# Altium PCB Dash.PcbDoc (part 1 of 2)
Units mm, origin at the board's own origin, x right, y up, seen from the top; angles counter-clockwise.
Board outline 82.55 x 101.6 mm, 2 copper layers (Top Layer, Bottom Layer); 87 components, 65 nets, 296 pads, 122 vias.
Unrouted connection lines stored in the file: 3.
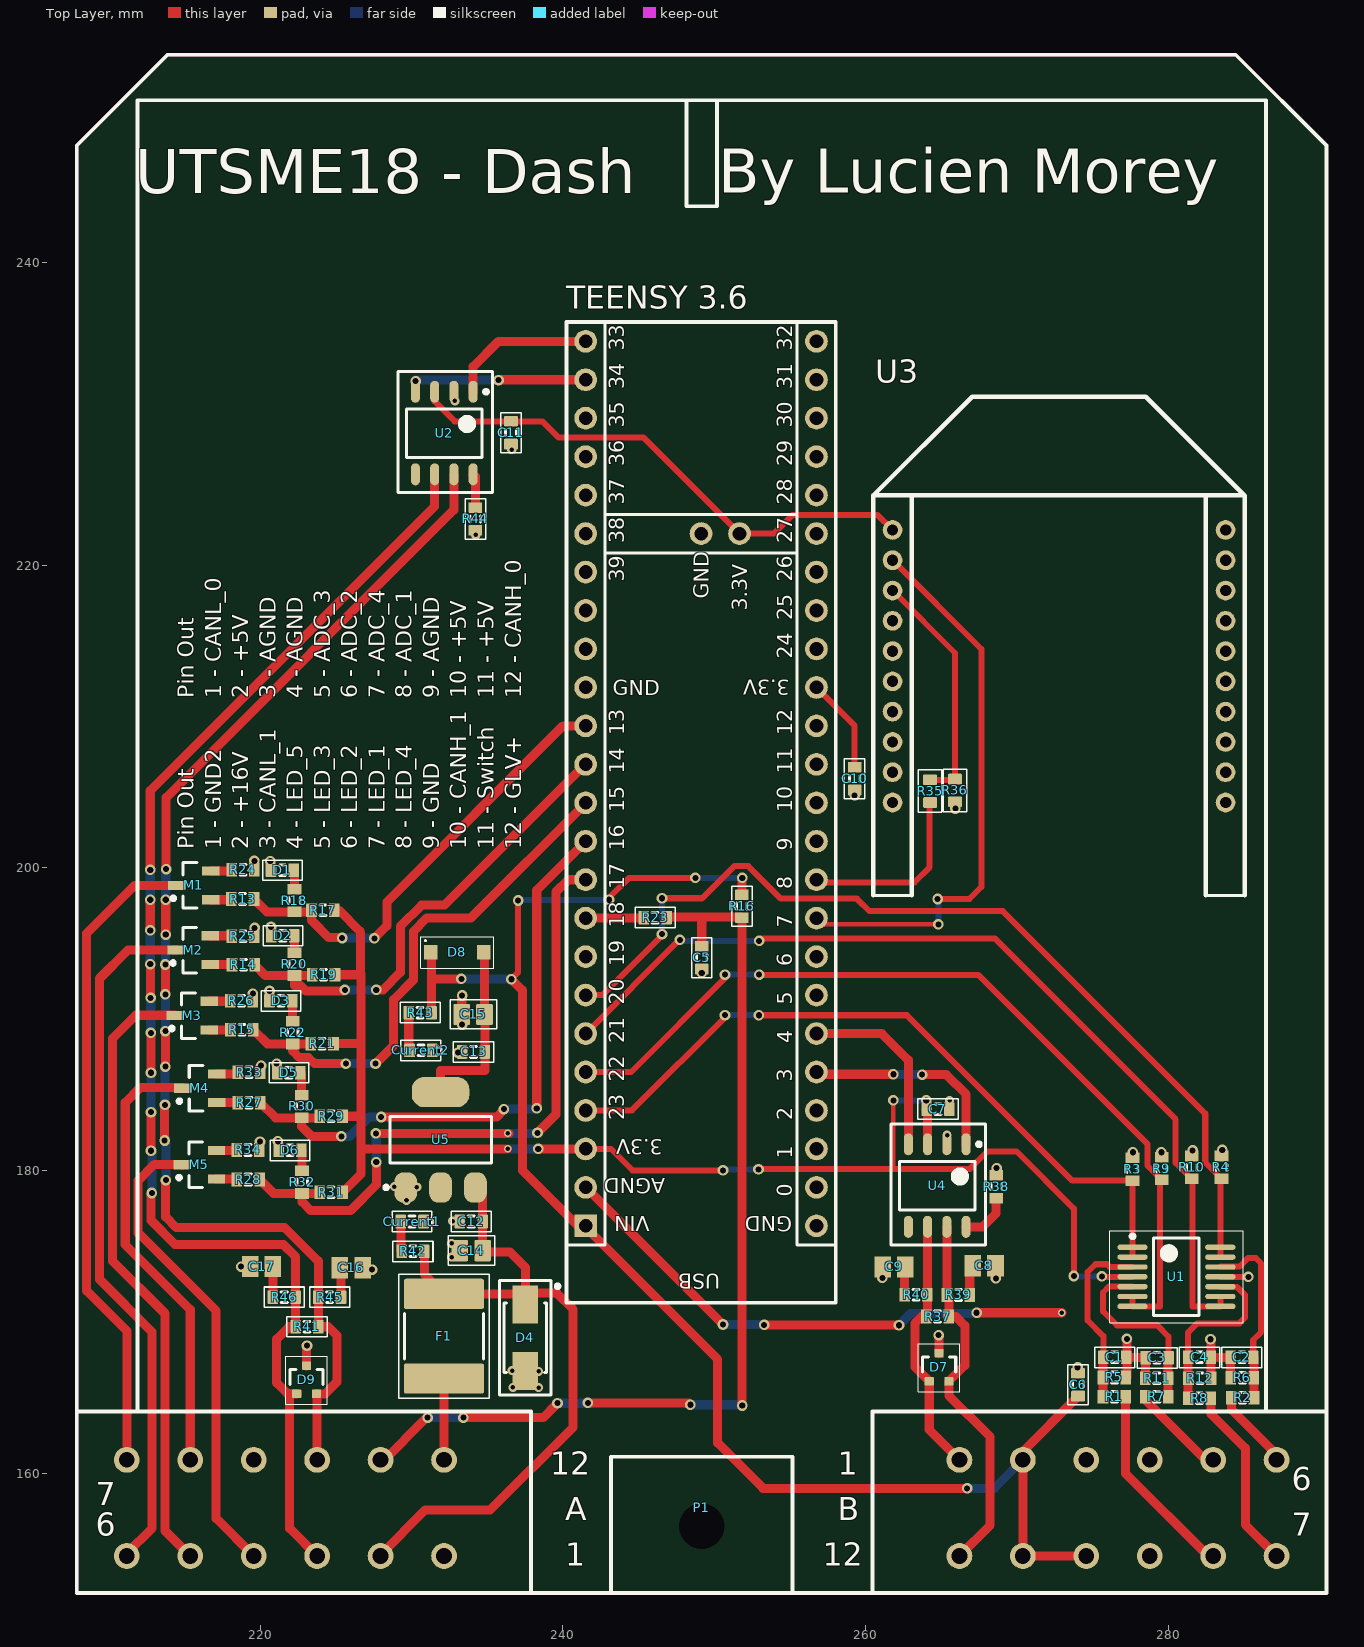
[diagram p0: Top Layer view]
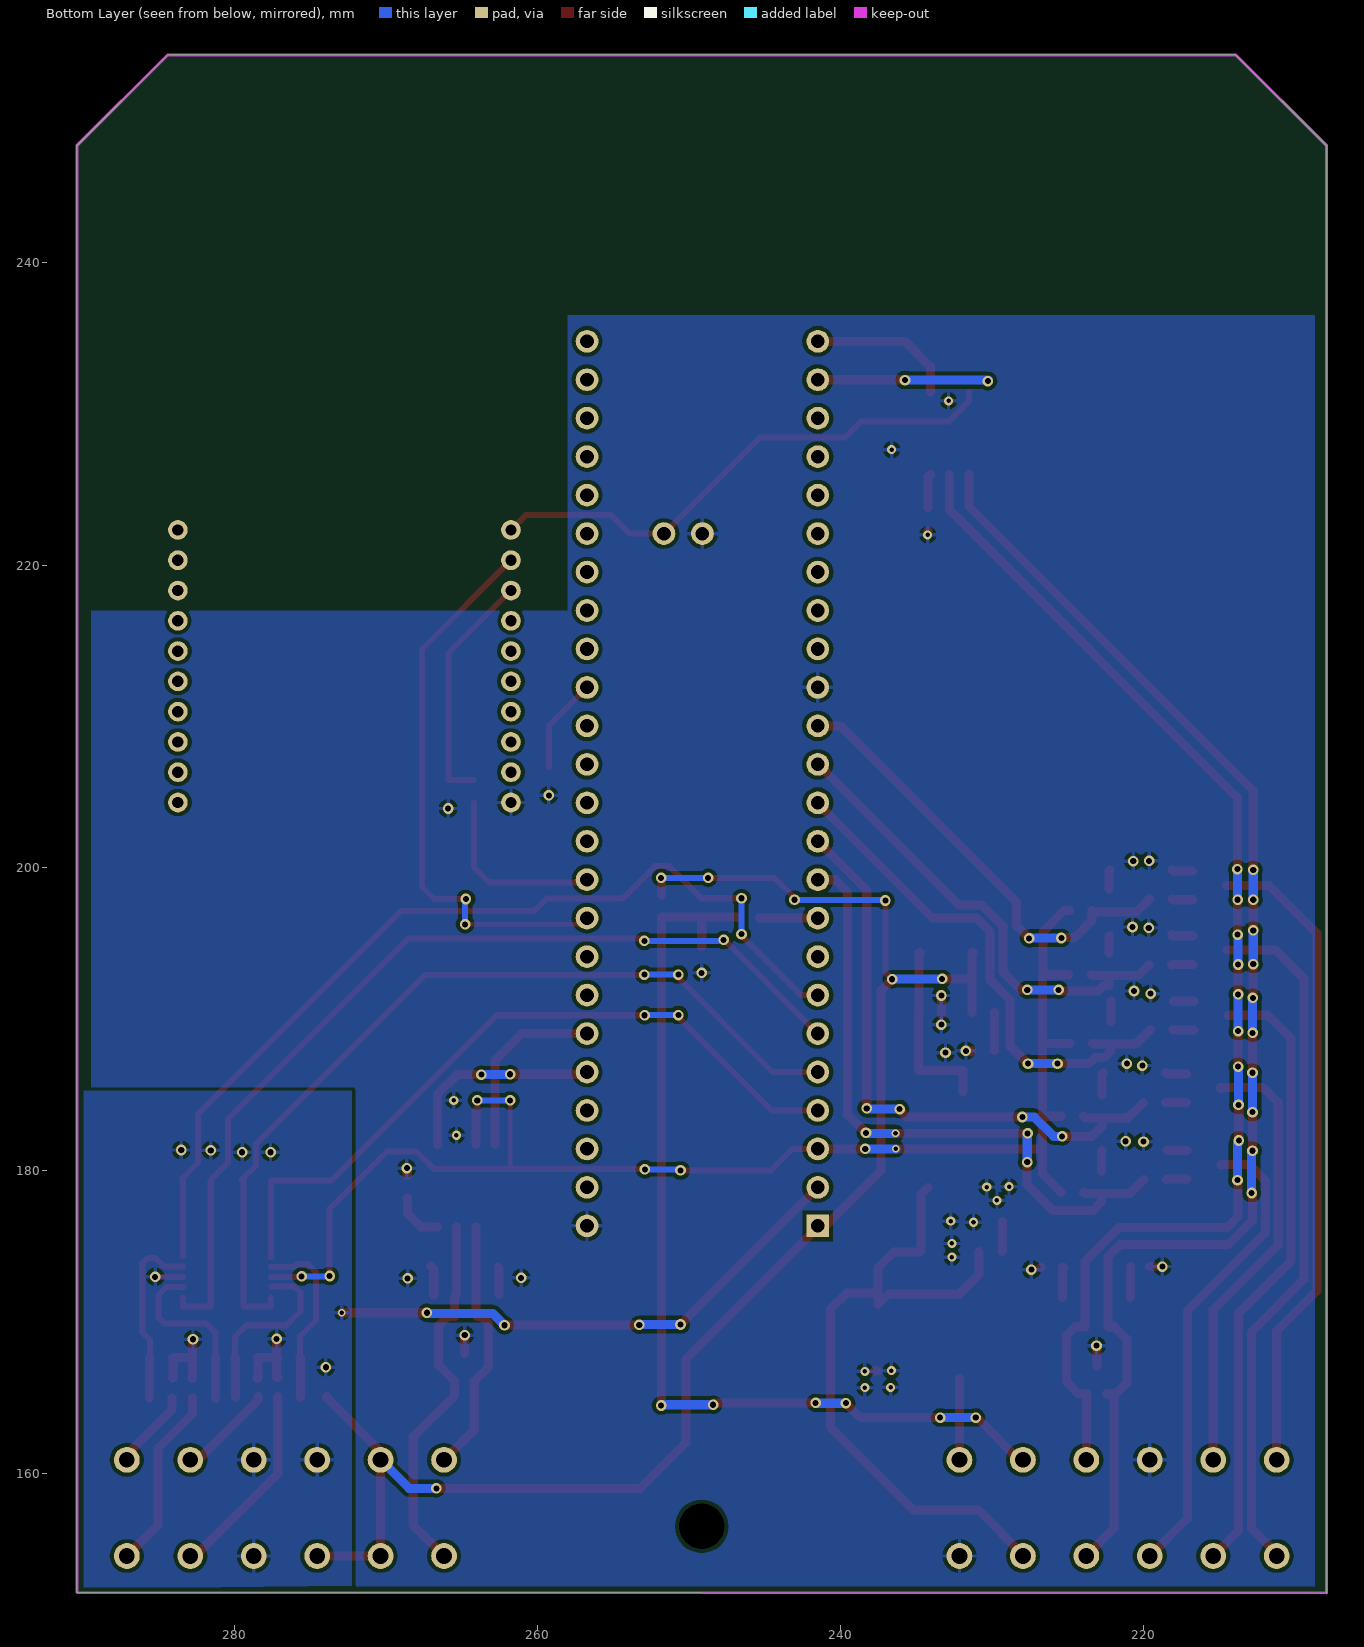
[diagram p1: Bottom Layer view, seen from below]

## Layer stack, top to bottom
Top Solder: solder mask 0.0102, Solder Resist, Dk 3.5
Top Layer: signal copper 0.0356
Dielectric 1: dielectric 0.32, FR-4, Dk 4.8
Bottom Layer: signal copper 0.0356
Bottom Solder: solder mask 0.0102, Solder Resist, Dk 3.5

## Board outline
207.9,152.1 207.9,247.7 213.9,253.7 284.45,253.7 290.45,247.7 290.45,152.15

## Design rules (kind name [scope] priority, off if disabled: settings)
Clearance [All] p1: gap=0.254 ignorepadtopadclearanceinfootprint=FALSE except(0: Arc-Hole Track-Hole SMDPad-Hole THPad-Hole Via-Hole Fill-Hole Poly-Hole Region-Hole Text-Hole; 0.25: Arc-Arc Arc-Track Arc-Text Track-Track Track-Text SMDPad-Text THPad-Text Via-Text Fill-Text Poly-Text Region-Text Text-Text)
ComponentClearance "DTMBoard to rest" [InComponent('P1')] p1: gap=0 collisioncheckmode=3 verticalgap=0 showdistances=FALSE
ComponentClearance [All] p2: gap=0.254 collisioncheckmode=3 verticalgap=0.254 showdistances=FALSE
HoleSize [All] p1: absolutevalues=TRUE maxlimit=5 minlimit=0.3 maxpercent=80.000 minpercent=20.000
PolygonConnect [All] p1: connectstyle=Relief reliefconductorwidth=0.254 reliefentries=4 polygonreliefangle="90 Angle" airgapwidth=0.254
RoutingVias [All] p1: holewidth=0.3 width=0.5 viastyle="Through Hole" minholewidth=0.3 minwidth=0.5 maxholewidth=0.4 maxwidth=0.7
SolderMaskExpansion [All] p1: expansion=0.102
UnConnectedPin [All] p1:
UnRoutedNet [All] p1: checkbadconnections=TRUE
Width [All] p1: maxlimit=0.6 minlimit=0.2 preferedwidth=0.3 minimp=50.000000 maximp=50.000000 favimp=50.000000
27 further rules are at their usual default settings.

## Components (designator, comment, footprint, x,y, rotation, side; value= is the part's Value field where it differs from the comment)
C1 "C 3000pF" J1-0603#1 276.45,167.675 r0 top
C2 "C 3000pF" J1-0603#1 284.85,167.675 r180 top
C3 "C 3000pF" J1-0603#1 279.25,167.65 r180 top
C4 "C 3000pF" J1-0603#1 282.05,167.675 r0 top
C5 "0.1uF Low ESR" J1-0603#1 249.175,194.075 r270 top
C6 "0.1uF Low ESR" J1-0603#1 274.025,165.875 r90 top
C7 "0.1uF Low ESR" J1-0603#1 264.775,184.075 r180 top
C8 "C 560pF" C0805#1 267.825,173.725 r180 top
C9 "C 560pF" C0805#1 261.875,173.65 r0 top
C10 "0.1uF Low ESR" J1-0603#1 259.275,205.9 r270 top
C11 "0.1uF Low ESR" J1-0603#1 236.575,228.75 r90 top
C12 "0.1uF 0603" J1-0603#1 233.95,176.65 r0 top
C13 "0.1uF 0603" J1-0603#1 234.1,187.85 r0 top
C14 "C 10uF 25V 0805" C0805#2 233.95,174.725 r180 top
C15 "C 10uF 25V 0805" C0805#2 234.075,190.325 r180 top
C16 "C 560pF" C0805#1 226.025,173.6 r180 top
C17 "C 560pF" C0805#1 220.1,173.675 r0 top
Current1 "LED 0603" "J1-0603 LED" 230.05,176.65 r0 top
Current2 "LED 0603" "J1-0603 LED" 230.625,187.95 r0 top
D1 "LED 0603" "J1-0603 LED" 221.475,199.85 r180 top
D2 "LED 0603" "J1-0603 LED" 221.5,195.525 r180 top
D3 "LED 0603" "J1-0603 LED" 221.375,191.225 r180 top
D4 "SMAJ16A" DO-214AC 237.525,168.975 r270 top
D5 "LED 0603" "J1-0603 LED" 221.9,186.475 r180 top
D6 "LED 0603" "J1-0603 LED" 221.975,181.35 r180 top
D7 "PESD1CAN" SOT323(SC-70) 264.85,167.025 r90 top
D8 "1N5819" SOD123 233.025,194.425 r0 top
D9 "PESD1CAN" SOT323(SC-70) 223.075,166.2 r90 top
F1 "PTC RESET FUSE 24V 3A 2920" "2920 (7351 Metric)" 232.15,169.075 r270 top
M1 "Mosfet N-Channel 3.3V Switch" SOT23_N 215.625,198.85 r180 top
M2 "Mosfet N-Channel 3.3V Switch" SOT23_N 215.6,194.575 r180 top
M3 "Mosfet N-Channel 3.3V Switch" SOT23_N 215.525,190.25 r180 top
M4 "Mosfet N-Channel 3.3V Switch" SOT23_N 216.025,185.45 r180 top
M5 "Mosfet N-Channel 3.3V Switch" SOT23_N 216,180.4 r180 top
P1 "DTM13-12PA-12PB-R008" DTM13-12PA-12PB-R008 249.172,156.519 r0 top locked
R1 "60.4K R" J1-0603#2 276.425,165.075 r180 top
R2 "60.4K R" J1-0603#2 284.9,165 r0 top
R3 "100K R" J1-0603#2 277.625,180.1 r270 top
R4 "100K R" J1-0603#2 283.5,180.225 r270 top
R5 "100K R" J1-0603#2 276.425,166.35 r0 top
R6 "100K R" J1-0603#2 284.875,166.325 r180 top
R7 "60.4K R" J1-0603#2 279.225,165.075 r0 top
R8 "60.4K R" J1-0603#2 282.05,164.975 r180 top
R9 "100K R" J1-0603#2 279.55,180.15 r270 top
R10 "100K R" J1-0603#2 281.525,180.225 r270 top
R11 "100K R" J1-0603#2 279.225,166.3 r180 top
R12 "100K R" J1-0603#2 282.075,166.3 r0 top
R13 "1K R" J1-0603#2 218.85,197.95 r180 top
R14 "1K R" J1-0603#2 218.9,193.6 r180 top
R15 "1K R" J1-0603#2 218.8,189.325 r180 top
R16 "100K R" J1-0603#1 251.825,197.475 r270 top
R17 "100K R" J1-0603#2 224.15,197.2 r0 top
R18 "1K R" J1-0603#2 222.275,197.85 r270 top
R19 "100K R" J1-0603#2 224.2,192.95 r0 top
R20 "1K R" J1-0603#2 222.275,193.65 r270 top
R21 "100K R" J1-0603#2 224.1,188.4 r0 top
R22 "1K R" J1-0603#2 222.15,189.125 r270 top
R23 "1K R" J1-0603#1 246.1,196.725 r0 top
R24 "220 R" J1-0603#2 218.875,199.875 r0 top
R25 "220 R" J1-0603#2 218.875,195.5 r0 top
R26 "220 R" J1-0603#2 218.775,191.225 r0 top
R27 "1K R" J1-0603#2 219.275,184.5 r180 top
R28 "1K R" J1-0603#2 219.225,179.425 r180 top
R29 "100K R" J1-0603#2 224.7,183.6 r0 top
R30 "1K R" J1-0603#2 222.75,184.25 r270 top
R31 "100K R" J1-0603#2 224.7,178.575 r0 top
R32 "1K R" J1-0603#2 222.775,179.25 r270 top
R33 "220 R" J1-0603#2 219.275,186.5 r0 top
R34 "220 R" J1-0603#2 219.2,181.375 r0 top
R35 "10K R" 0603 264.25,205.075 r270 top value=10K
R36 "15K R" 0603 265.9,205.125 r90 top value=15k
R37 "120 R" J1-0603#2 264.75,170.375 r180 top
R38 "10K R" J1-0603#2 268.625,178.95 r270 top value=10K
R39 "100 R" J1-0603#2 266.125,171.8 r0 top
R40 "100 R" J1-0603#2 263.325,171.825 r0 top
R41 "120 R" J1-0603#1 223.1,169.7 r180 top
R42 "4.7K R" J1-0603#1 230.1,174.675 r180 top
R43 "2.61k R" J1-0603#1 230.575,190.45 r180 top
R44 "10K R" J1-0603#1 234.225,223.05 r90 top value=10K
R45 "100 R" J1-0603#1 224.6,171.65 r0 top
R46 "100 R" J1-0603#1 221.6,171.65 r0 top
"TEENSY 3.6" "Teensy 3.6" "Teensy 3.6" 256.75,181.445 r90 top
U1 "OPA4342EA/250" TSSOP-14 280.525,173 r0 top
U2 "CAN Transceiver 3.3V" 8-SOIC 232.17,228.725 r270 top
U3 "Xbee Pro" "Xbee Pro" 285.016,224.603 r0 top
U4 "CAN Transceiver 3.3V" 8-SOIC 264.725,179.025 r270 top
U5 "5V 1A LDO Regulator NCP1117" SOT-223 231.925,182.05 r90 top

## Footprints (in the part's own frame and the unit in brackets; to place one, negate y for a bottom-side part, rotate by r counter-clockwise, add the part's x,y. Pads: shape width x height; smd on the part's side, far side on the other; paste and mask are expansions set on the pad)
8-SOIC [mm]
  oval 1.45x0.6 smd: 1(-2.725,1.905) 2(-2.725,0.635) 3(-2.725,-0.635) 4(-2.725,-1.905) 5(2.725,-1.905) 6(2.725,-0.635) 7(2.725,0.635) 8(2.725,1.905)
  silkscreen extent -4.06,-3.05 3.94,3.18, body extent -2,-2.5 2,2.5, height 1.75
0603 [mm] "Chip Resistor, Body 1.6x0.8mm, IPC High Density"
  rrect15% 0.7x0.9 smd: 1(-0.75,0) 2(0.75,0)
  silkscreen extent -1.4,-0.76 1.4,0.76, body extent -0.85,-0.48 0.85,0.48, height 0.9
"2920 (7351 Metric)" [mm]
  rrect15% 2x5.3 smd: 1(-2.8,0) 2(2.8,0)
  silkscreen extent -4.1,-3 4.1,3, body extent -3,-2.4 3.2,2.5, height 1.6
C0805#1 [mm] "Chip Capacitor, Body 2.0x1.3mm, IPC High Density"
  rect 1.1x1.4 smd: 1(-0.75,0) 2(0.75,0)
  body extent -1.1,-0.72 1.1,0.72, height 1.4
C0805#2 [mm] "Chip Capacitor, Body 2.0x1.3mm, IPC High Density"
  rrect15% 1.1x1.4 smd: 1(-0.75,0) 2(0.75,0)
  silkscreen extent -1.55,-0.97 1.53,0.95, body extent -1.1,-0.72 1.1,0.72, height 1.4
DO-214AC [mm] "DO-214AC (SMA)"
  rect 2.5x1.7 smd: 1(-2.2,0) 2(2.2,0)
  silkscreen extent -3.77,-1.7 3.77,2.25, body extent -2.3,-1.39 2.3,1.4, height 2.29
DTM13-12PA-12PB-R008 [mm]
  round 1.7 hole 1.04: 1(-17.02,-1.96) 2(-21.21,-1.96) 3(-25.4,-1.96) 4(-29.59,-1.96) 5(-33.78,-1.96) 6(-37.97,-1.96) 7(-37.97,4.39) 8(-33.78,4.39) 9(-29.59,4.39) 10(-25.4,4.39) 11(-21.21,4.39) 12(-17.02,4.39) 13(17.02,4.39) 14(21.21,4.39) 15(25.4,4.39) 16(29.59,4.39) 17(33.78,4.39) 18(37.97,4.39) 19(37.97,-1.96) 20(33.78,-1.96) 21(29.59,-1.96) 22(25.4,-1.96) 23(21.21,-1.96) 24(17.02,-1.96)
  round 1.524 hole 3 unplated: ""(0,0)
  silkscreen extent -41.27,-4.41 41.27,97.19
J1-0603#1 [mm] "Chip Resistor, Body 1.6x0.8mm, IPC High Density"
  rrect15% 0.7x0.9 smd: 1(-0.75,0) 2(0.75,0)
  silkscreen extent -1.33,-0.67 1.33,0.67, body extent -0.85,-0.48 0.85,0.48, height 0.9
J1-0603#2 [mm] "Chip Resistor, Body 1.6x0.8mm, IPC High Density"
  rect 0.7x0.9 smd: 1(-0.75,0) 2(0.75,0)
  silkscreen extent -0.2,-0.35 0.2,0.35, body extent -0.85,-0.48 0.85,0.48, height 0.9
"J1-0603 LED" [mm] "Chip Resistor, Body 1.6x0.8mm, IPC High Density"
  rrect15% 0.7x0.9 smd: 1(-0.75,0) 2(0.75,0)
  silkscreen extent -1.33,-0.67 1.3,0.67, body extent -0.85,-0.48 0.85,0.48, height 0.5
SOD123 [mm] "SOD123"
  rect 0.9x0.95 smd: 1(-1.75,0) 2(1.75,0)
  silkscreen extent -2.4,-1.05 2.4,1.02, body extent -1.85,-0.85 1.85,0.85, height 1.45
SOT23_N [mm] "SOT23, 3-Leads, Body 2.9x1.3mm, Pitch 0.95mm, Lead Span 2.3mm - Reverse Pinning, IPC Medium Density"
  rect 1.15x0.6 smd: 1(1.125,0) 2(-1.125,-0.95) 3(-1.125,0.95)
  silkscreen extent -0.2,-1.5 1.47,1.5, body extent -0.7,-1.5 0.7,1.5, height 1.1
SOT323(SC-70) [mm] "SOT323(SC-70)"
  rrect15% 0.55x0.6 smd: 1(-0.925,0.65) 2(-0.925,-0.65) 3(0.925,0)
  silkscreen extent -1.63,-1.35 1.55,1.38, body extent -1.15,-1.1 1.15,1.1, height 1.1
SOT-223 [mm] "SOT223, 4-Leads, Body 6.50x7.00mm (avg), Pitch 2.30mm, IPC Medium Density"
  rrect80% 2x1.5 smd: 1(-3.15,2.3) 2(-3.15,0) 3(-3.15,-2.3)
  rrect80% 2x3.8 smd: 2(3.15,0)
  silkscreen extent -3.27,-3.35 1.55,3.72, body extent -3.5,-3.35 3.5,3.35, height 1.8
"Teensy 3.6" [mm]
  round 1.5 hole 0.9: 0(-2.54,0) 1(0,0) 2(2.54,0) 3(5.08,0) 3.3V(0,15.24) 3.3V(30.48,0) 3.3V(40.64,5.08) 4(7.62,0) 5(10.16,0) 6(12.7,0) 7(15.24,0) 8(17.78,0) 9(20.32,0) 10(22.86,0) 11(25.4,0) 12(27.94,0) 13(27.94,15.24) 14(25.4,15.24) 15(22.86,15.24) 16(20.32,15.24) 17(17.78,15.24) 18(15.24,15.24) 19(12.7,15.24) 20(10.16,15.24) 21(7.62,15.24) 22(5.08,15.24) 23(2.54,15.24) 24(33.02,0) 25(35.56,0) 26(38.1,0) 27(40.64,0) 28(43.18,0) 29(45.72,0) 30(48.26,0) 31(50.8,0) 32(53.34,0) 33(53.34,15.24) 34(50.8,15.24) 35(48.26,15.24) 36(45.72,15.24) 37(43.18,15.24) 38(40.64,15.24) 39(38.1,15.24) A21(35.56,15.24) A22(33.02,15.24) AGND(-2.54,15.24) GND(-5.08,0) GND(30.48,15.24) GND(40.64,7.62)
  rect 1.5x1.5 hole 0.9: VIN(-5.08,15.24)
  silkscreen extent -10.16,-1.27 54.61,16.51, body extent -6.74,-1.02 54.61,16.76, height 7.71
TSSOP-14 [mm]
  oval 2x0.35 smd: 1(-2.9,1.95) 2(-2.9,1.3) 3(-2.9,0.65) 4(-2.9,0) 5(-2.9,-0.65) 6(-2.9,-1.3) 7(-2.9,-1.95) 8(2.9,-1.95) 9(2.9,-1.3) 10(2.9,-0.65) 11(2.9,0) 12(2.9,0.65) 13(2.9,1.3) 14(2.9,1.95)
  silkscreen extent -4.4,-3.05 4.4,3.05, body extent -2.25,-2.55 2.25,2.55, height 1.2
"Xbee Pro" [mm]
  round 1.3 hole 0.75: 1(-23.241,-2.278) 2(-23.241,-4.278) 3(-23.241,-6.278) 4(-23.241,-8.278) 5(-23.241,-10.278) 6(-23.241,-12.278) 7(-23.241,-14.278) 8(-23.241,-16.278) 9(-23.241,-18.278) 10(-23.241,-20.278) 11(-1.245,-20.278) 12(-1.245,-18.278) 13(-1.245,-16.278) 14(-1.245,-14.278) 15(-1.245,-12.278) 16(-1.245,-10.278) 17(-1.245,-8.278) 18(-1.245,-6.278) 19(-1.245,-4.278) 20(-1.245,-2.278)
  silkscreen extent -24.51,-26.42 0.03,6.53, body extent -24.51,-26.42 0.03,0, height 4.44

## Part data
C1 C2 C3 C4: library part "C 3000pF 0603 50V", "0603 Ceramic Capacitor", Capacitance=3000pF, Manufacturer="Murata Electronics North America", Manufacturer Part Number=GRM1885C1H302JA01D, Operating Temperature="-55°C ~ 125°C", Package / Case="0603 (1608 Metric)", Ratings=-, Supplier Part Number 1=490-6384-1-ND, Temperature Coefficient="C0G, NP0", Tolerance=±5%, Voltage - Rated=50V, Applications="General Purpose", Category=Capacitors, ComponentLink1Description=http://www.murata.com/~/media/webrenewal/support/library/catalog/products/capacitor/mlcc/c02e.ashx, ComponentLink1URL=http://www.murata.com/~/media/webrenewal/support/library/catalog/products/capacitor/mlcc/c02e.ashx, Features=-, Height - Seated (Max)=-, Lead Spacing=-, Lead Style=-, Mounting Type="Surface Mount, MLCC", Packaging="Cut Tape (CT)", Part Status=Active, Pricing 1="1=0.28, 10=0.201, 100=0.0945, 1000=0.05483 (AUD)", RoHS="RoHS Compliant", Size / Dimension="0.063\" L x 0.031\" W (1.60mm x 0.80mm)", Stock 1=84271, Supplier 1=Digi-Key, Thickness (Max)="0.035\" (0.90mm)"
C5 C6 C7 C10 C11: library part "C0.1uF  Low ESR 0603 250V", "CAP CER 0.1UF 100V 10% X7R 0603", Capacitance=100pF, Manufacturer="AVX Corporation", Manufacturer Part Number=06031U101GAT2A, Operating Temperature="-55°C ~ 125°C", Package / Case="0603 (1608 Metric)", Ratings=-, Supplier Part Number 1=478-10231-1-ND, Temperature Coefficient="C0G, NP0", Tolerance=±2%, Voltage - Rated=100V, Applications="RF, Microwave, High Frequency", Category=Capacitors, ComponentLink1Description=http://datasheets.avx.com/AutoU_Series.pdf, ComponentLink1URL=http://datasheets.avx.com/AutoU_Series.pdf, Features="Ultra-Low ESR", Height - Seated (Max)=-, Lead Spacing=-, Lead Style=-, Mounting Type="Surface Mount, MLCC", Packaging="Cut Tape (CT)", Part Status=Active, Pricing 1="1=0.49, 10=0.337, 100=0.2025, 500=0.15186, 1000=0.12823 (AUD)", RoHS="RoHS Compliant", Size / Dimension="0.060\" L x 0.030\" W (1.52mm x 0.76mm)", Stock 1=16000, Supplier 1=Digi-Key, Thickness (Max)="0.036\" (0.91mm)"
C8 C9 C16 C17: library part "C 560pF 0805 50V", "0805 Ceramic Capacitor", Capacitance=560pF, Manufacturer=KEMET, Manufacturer Part Number=C0805C561K5RACTU, Operating Temperature="-55°C ~ 125°C", Package / Case="0805 (2012 Metric)", Ratings=-, Supplier Part Number 1=399-1143-1-ND, Temperature Coefficient=X7R, Tolerance=±10%, Voltage - Rated=50V, Applications="General Purpose", Category=Capacitors, ComponentLink1Description=http://www.kemet.com/docfinder?Partnumber=C0805C561K5RACTU, ComponentLink1URL=http://www.kemet.com/docfinder?Partnumber=C0805C561K5RACTU, Failure Rate=-, Features="Low ESL", Height - Seated (Max)=-, Lead Spacing=-, Lead Style=-, Mounting Type="Surface Mount, MLCC", Packaging="Cut Tape (CT)", Part Status=Active, Pricing 1="1=0.35, 10=0.247, 25=0.1972, 50=0.1646, 100=0.1398, 250=0.11108, 500=0.09872, 1000=0.08636 (AUD)", RoHS="RoHS Compliant", Size / Dimension="0.079\" L x 0.049\" W (2.00mm x 1.25mm)", Stock 1=51668, Supplier 1=Digi-Key, Thickness (Max)="0.035\" (0.88mm)"
C12 C13: library part "C 0.1uF 0603 50V", "CAP CER 0.1UF 50V X8L 0603", Capacitance=100nF, Case/Package=0603, Case Code (Metric)=1608, Dielectric=X8L, Manufacturer=Murata, Manufacturer Part Number=GCM188L81H104KA57D, Max Operating Temperature=150°C, Min Operating Temperature=-55°C, Package Quantity=4000, Supplier Part Number 1=490-6049-6-ND, Tolerance=10%, Voltage=50V, Case Code (Imperial)=0603, ComponentLink1Description=https://datasheet.ciiva.com/5999/1725424-5999395.pdf, ComponentLink1URL=https://datasheet.ciiva.com/5999/1725424-5999395.pdf, ComponentLink2Description=https://datasheet.ciiva.com/7823/1725424-7823589.pdf, ComponentLink2URL=https://datasheet.ciiva.com/7823/1725424-7823589.pdf, ComponentLink3Description=https://datasheet.ciiva.com/14589/70095383-14589014.pdf, ComponentLink3URL=https://datasheet.ciiva.com/14589/70095383-14589014.pdf, ComponentLink4Description=https://datasheet.ciiva.com/22749/kem-c1002-x7r-smd-22749657.pdf, ComponentLink4URL=https://datasheet.ciiva.com/22749/kem-c1002-x7r-smd-22749657.pdf, ComponentLink5Description=https://datasheet.ciiva.com/5413/kem-c1002-x7r-smd-5413791.pdf, ComponentLink5URL=https://datasheet.ciiva.com/5413/kem-c1002-x7r-smd-5413791.pdf, ComponentLink6Description=http://www.kemet.com/docfinder?Partnumber=C0603C104K4RACTU, ComponentLink6URL=http://www.kemet.com/docfinder?Partnumber=C0603C104K4RACTU, ComponentLink7Description=https://datasheet.ciiva.com/6277/s0717e-6277799.pdf, ComponentLink7URL=https://datasheet.ciiva.com/6277/s0717e-6277799.pdf, ComponentLink8Description=https://datasheet.ciiva.com/6277/s0717e-6277800.pdf, ComponentLink8URL=https://datasheet.ciiva.com/6277/s0717e-6277800.pdf, ComponentLink9Description=https://datasheet.ciiva.com/6277/s0717e-6277801.pdf, ComponentLink9URL=https://datasheet.ciiva.com/6277/s0717e-6277801.pdf, Depth=0.8mm, Height=0.8mm, Lead Free="Lead Free", Length=1.6mm, Mount="Surface Mount", Packaging="Tape and Reel", Pricing 1="1=0.19, 10=0.133, 100=0.0624, 500=0.04378, 1000=0.03624 (USD)", Radiation Hardening=No, Stock 1=175, Supplier 1=Digi-Key, Termination=SMD/SMT, Thickness=0.035inch, Voltage Rating=50V, Voltage Rating (DC)=50V, Width=0.5mm
C14 C15: "CAP CER 10UF 25V X5R 0805", Capacitance=10µF, Manufacturer="Samsung Electro-Mechanics America, Inc.", Manufacturer Part Number=CL21A106KAFN3NE, Operating Temperature="-55°C ~ 85°C", Package / Case="0805 (2012 Metric)", Ratings=-, Supplier Part Number 1=1276-2891-1-ND, Temperature Coefficient=X5R, Tolerance=±10%, Voltage - Rated=25V, Applications="General Purpose", Category=Capacitors, ComponentLink1Description=http://media.digikey.com/pdf/Data%20Sheets/Samsung%20PDFs/CL_Series_MLCC_ds.pdf, ComponentLink1URL=http://media.digikey.com/pdf/Data%20Sheets/Samsung%20PDFs/CL_Series_MLCC_ds.pdf, Features=-, Height - Seated (Max)=-, Lead Spacing=-, Lead Style=-, Mounting Type="Surface Mount, MLCC", Packaging="Cut Tape (CT)", Part Status=Active, Pricing 1="1=0.31, 10=0.209, 100=0.1056, 500=0.07228, 1000=0.06394 (AUD)", RoHS="RoHS Compliant", Size / Dimension="0.079\" L x 0.049\" W (2.00mm x 1.25mm)", Stock 1=116435, Supplier 1=Digi-Key, Thickness (Max)="0.053\" (1.35mm)"
Current1 Current2 D1 D2 D3 D5 D6: "Typical INFRARED GaAs LED", Color=Red, Current - Test=20mA, Lens Color=Colorless, Manufacturer=Dialight, Manufacturer Part Number=5988010107F, Millicandela Rating=60mcd, Package / Case="0603 (1608 Metric)", Supplier Part Number 1=350-2029-1-ND, Voltage - Forward (Vf) (Typ)=2V, Category=Optoelectronics, ComponentLink1Description=http://media.digikey.com/pdf/Data%20Sheets/Dialight%20PDFs/598_Series_0603_Pkg.pdf, ComponentLink1URL=http://media.digikey.com/pdf/Data%20Sheets/Dialight%20PDFs/598_Series_0603_Pkg.pdf, Height (Max)=0.70mm, LatestRevisionDate=08-Jul-2005, LatestRevisionNote="Mech Layer 1 removed.", Lens Style/Size="Rectangle with Flat Top, 1.10mm x 0.80mm", Lens Transparency=Clear, Mounting Type="Surface Mount", PackageDescription="LED; 2 Leads", PackageReference=LED-0, Packaging="Cut Strip", Pricing 1="1=0.6, 10=0.461, 100=0.3308, 250=0.2954, 500=0.25404, 1000=0.19613, 2500=0.17722, 5000=0.1668 (AUD)", Published=8-Jun-2000, Publisher="Altium Limited", RoHS="RoHS Compliant", Size / Dimension="1.60mm L x 0.80mm W", Stock 1=134, Supplier 1=Digi-Key, Viewing Angle=140°, Wavelength - Dominant=635nm, Wavelength - Peak=-
D4: "TVS DIODE 16VWM 26VC SMA", Breakdown Voltage-Max="19.7 V", Breakdown Voltage-Min="17.8 V", Capacitance @ Frequency=-, Clamping Voltage-Max="26 V", Current - Peak Pulse (10/1000µs)=15.4A, Manufacturer=Littelfuse, Operating Temperature="-55°C ~ 150°C (TJ)", Package / Case="DO-214AC, SMA", Power - Peak Pulse=400W, Power Dissipation="400 W", Power Line Protection=No, Supplier Device Package="DO-214AC (SMA)", Supplier Part Number 1=SMAJ16ALFCT-ND, Voltage - Breakdown (Min)=17.8V, Voltage - Clamping (Max) @ Ipp=26V, Voltage - Reverse Standoff (Typ)=16V, Applications="General Purpose", Bidirectional Channels=-, Category="Circuit Protection", ComponentLink1Description=https://datasheet.ciiva.com/340/littelfuse-tvs-diode-smaj-datasheet-pdf-340499.pdf, ComponentLink1URL=https://datasheet.ciiva.com/340/littelfuse-tvs-diode-smaj-datasheet-pdf-340499.pdf, ComponentLink2Description=https://datasheet.ciiva.com/340/littelfuse-tvs-diode-smaj-datasheet-pdf-340500.pdf, ComponentLink2URL=https://datasheet.ciiva.com/340/littelfuse-tvs-diode-smaj-datasheet-pdf-340500.pdf, ComponentLink3Description=https://datasheet.ciiva.com/340/littelfuse-tvs-diode-smaj-datasheet-pdf-340501.pdf, ComponentLink3URL=https://datasheet.ciiva.com/340/littelfuse-tvs-diode-smaj-datasheet-pdf-340501.pdf, ComponentLink4Description=https://datasheet.ciiva.com/16212/littelfuse-tvs-diode-smaj-16212775.pdf, ComponentLink4URL=https://datasheet.ciiva.com/16212/littelfuse-tvs-diode-smaj-16212775.pdf, ComponentLink5Description=https://datasheet.ciiva.com/4508/littelfuse-tvs-diode-smaj-23503-4508106.pdf, ComponentLink5URL=https://datasheet.ciiva.com/4508/littelfuse-tvs-diode-smaj-23503-4508106.pdf, ComponentLink6Description=http://www.littelfuse.com/~/media/electronics/datasheets/tvs_diodes/littelfuse_tvs_diode_smaj_datasheet.pdf.pdf, ComponentLink6URL=http://www.littelfuse.com/~/media/electronics/datasheets/tvs_diodes/littelfuse_tvs_diode_smaj_datasheet.pdf.pdf, Directional=Uni-Directional, Manufacturer Part Number=SMAJ16A, Mounting Type="Surface Mount", Packaging="Cut Tape (CT)", Part Status=Active, Pricing 1="1=0.56, 10=0.433, 25=0.3656, 100=0.2978, 250=0.24672, 500=0.2042, 1000=0.15314, 2500=0.14038 (AUD)", RoHS="RoHS Compliant", Stock 1=34991, Supplier 1=Digi-Key, Type=Zener, Unidirectional Channels=1
D7 D9: Capacitance @ Frequency="9.3pF @ 1MHz", Current - Peak Pulse (10/1000µs)="3A (8/20µs)", Manufacturer="Nexperia USA Inc.", Manufacturer Part Number=PESD1CAN-UX, Operating Temperature="-55°C ~ 150°C (TA)", Package / Case="SC-70, SOT-323", Power - Peak Pulse=150W, Power Line Protection=No, Supplier Device Package=SOT-323-3, Supplier Part Number 1=1727-1306-1-ND, Voltage - Breakdown (Min)=25.4V, Voltage - Clamping (Max) @ Ipp=50V, Voltage - Reverse Standoff (Typ)="24V (Max)", Applications=CAN, Category="Circuit Protection", ComponentLink1Description=http://assets.nexperia.com/documents/data-sheet/PESD1CAN-U.pdf, ComponentLink1URL=http://assets.nexperia.com/documents/data-sheet/PESD1CAN-U.pdf, Mounting Type="Surface Mount", Packaging="Cut Tape (CT)", Part Status=Active, Pricing 1="1=0.49, 10=0.402, 100=0.274, 500=0.20544, 1000=0.15407 (AUD)", RoHS="RoHS Compliant", Stock 1=61695, Supplier 1=Digi-Key, Type=Zener
D8: library part "Diode 1N5819", "Schottky Barrier Rectifier", Capacitance @ Vr, F="60pF @ 4V, 1MHz", Current - Average Rectified (Io)=1A, Current - Reverse Leakage @ Vr="1mA @ 40V", Manufacturer="Diodes Incorporated", Manufacturer Part Number=1N5819HW-7-F, Operating Temperature - Junction="-65°C ~ 125°C", Package / Case=SOD-123, Supplier Part Number 1=1N5819HW-FDICT-ND, Voltage - DC Reverse (Vr) (Max)=40V, Voltage - Forward (Vf) (Max) @ If="450mV @ 1A", Category="Discrete Semiconductor Products", ComponentLink1Description=http://www.diodes.com/assets/Datasheets/ds30217.pdf, ComponentLink1URL=http://www.diodes.com/assets/Datasheets/ds30217.pdf, Diode Type=Schottky, Mounting Type="Surface Mount", Packaging="Cut Tape (CT)", Part Status=Active, Pricing 1="1=0.64, 10=0.471, 100=0.267, 500=0.17682, 1000=0.13556 (AUD)", Reverse Recovery Time (trr)=-, RoHS="RoHS Compliant", Speed="Fast Recovery =< 500ns, > 200mA (Io)", Stock 1=76491, Supplier 1=Digi-Key, Supplier Device Package=SOD-123
F1: Manufacturer="Bourns Inc.", Manufacturer Part Number=MF-LSMF300/24X-2, Operating Temperature="-40°C ~ 85°C", Package / Case="2920 (7351 Metric), Concave", Ratings=AEC-Q200, Supplier Part Number 1=MF-LSMF300/24X-2CT-ND, Voltage - Max=24V, Approvals="cURus, TUV", Category="Circuit Protection", ComponentLink1Description=http://www.bourns.com/docs/Product-Datasheets/mflsmf.pdf, ComponentLink1URL=http://www.bourns.com/docs/Product-Datasheets/mflsmf.pdf, Height - Seated (Max)=-, Lead Spacing=-, Mounting Type="Surface Mount", Packaging="Cut Tape (CT)", Part Status=Active, Pricing 1="1=1.24, 5=1.196, 10=1.12, 50=0.9266, 100=0.7722, 250=0.75288, 500=0.63708, 1000=0.55985 (AUD)", RoHS="RoHS Compliant", Size / Dimension="0.289\" L x 0.202\" W (7.36mm x 5.12mm)", Stock 1=136194, Supplier 1=Digi-Key, Thickness (Max)="0.063\" (1.60mm)", Type=Polymeric
M1 M2 M3 M4 M5: library part "Mosfet IRLML6244TRPBFCT-ND", "MOSFET N-CH 30V 5A SOT23", Current - Continuous Drain (Id) @ 25°C="6.3A (Ta)", Drive Voltage (Max Rds On,  Min Rds On)="2.5V, 4.5V", Manufacturer="Infineon Technologies", Manufacturer Part Number=IRLML6244TRPBF, Operating Temperature="-55°C ~ 150°C (TJ)", Package / Case="TO-236-3, SC-59, SOT-23-3", Power Dissipation (Max)="1.3W (Ta)", Supplier Device Package=Micro3™/SOT-23, Supplier Part Number 1=IRLML6244TRPBFCT-ND, Category="Discrete Semiconductor Products", ComponentLink1Description=https://www.infineon.com/dgdl/irlml6244pbf.pdf?fileId=5546d462533600a4015356686fed261f, ComponentLink1URL=https://www.infineon.com/dgdl/irlml6244pbf.pdf?fileId=5546d462533600a4015356686fed261f, FET Feature=-, FET Type=N-Channel, Mounting Type="Surface Mount", Packaging="Cut Tape (CT)", Part Status=Active, Pricing 1="1=0.74, 10=0.585, 100=0.4017, 500=0.2754, 1000=0.20654 (AUD)", Rds On (Max) @ Id, Vgs="21 mOhm @ 6.3A, 4.5V", RoHS="RoHS Compliant", Stock 1=29388, Supplier 1=Digi-Key, Technology="MOSFET (Metal Oxide)", Vgs (Max)=±12V, Vgs(th) (Max) @ Id="1.1V @ 10µA"
P1: Current Rating=-, Insulation Color=Gray, Manufacturer="TE Connectivity Deutsch Connectors", Supplier Part Number 1=1734-1131-ND, Applications=Automotive, Category="Connectors, Interconnects", ComponentLink1Description=http://www.te.com/commerce/DocumentDelivery/DDEController?Action=srchrtrv&DocNm=DTM13-12PX-12PX-R008&DocType=Customer+Drawing&DocLang=English, ComponentLink1URL=http://www.te.com/commerce/DocumentDelivery/DDEController?Action=srchrtrv&DocNm=DTM13-12PX-12PX-R008&DocType=Customer+Drawing&DocLang=English, Connector Type=Header, Contact Finish - Mating=Nickel, Contact Finish - Post=Tin, Contact Finish Thickness - Mating=-, Contact Finish Thickness - Post=-, Contact Length - Mating=-, Contact Length - Post="0.112\" (2.84mm)", Contact Material=-, Contact Shape=Circular, Contact Type="Male Pin", Fastening Type="Latch Holder", Features="Mounting Flange", Ingress Protection=IP68/IP6K9K, Insulation Height="1.378\" (35.00mm)", Insulation Material=Plastic, Manufacturer Part Number=DTM13-12PA-12PB-R008, Mated Stacking Heights=-, Material Flammability Rating=-, Mounting Type="Panel Mount, Through Hole, Right Angle", Number of Positions="24 (12 + 12)", Number of Positions Loaded=All, Number of Rows=2, Operating Temperature=-, Overall Contact Length=-, Packaging=Bulk, Part Status=Active, Pitch - Mating=-, Pricing 1="1=30.07, 10=27.152, 25=26.0132, 50=24.3874, 100=23.5746, 250=22.27388, 500=21.62356 (AUD)", RoHS="RoHS Compliant", Row Spacing - Mating=-, Shrouding="Shrouded - 4 Wall", Stock 1=3139, Style="Board to Cable/Wire", Supplier 1=Digi-Key, Termination=Solder, Voltage Rating=-
R1 R2 R7 R8: library part R60.4k_0603, "60.4k Resistor 0603", Manufacturer=Yageo, Manufacturer Part Number=RC0603FR-0760K4L, Operating Temperature="-55°C ~ 155°C", Package / Case="0603 (1608 Metric)", Power (Watts)="0.1W, 1/10W", Resistance (Ohms)=60.4k, Supplier Device Package=0603, Supplier Part Number 1=311-60.4KHRCT-ND, Temperature Coefficient=±100ppm/°C, Tolerance=±1%, Category=Resistors, ComponentLink1Description=http://www.yageo.com/documents/recent/PYu-RC_Group_51_RoHS_L_7.pdf, ComponentLink1URL=http://www.yageo.com/documents/recent/PYu-RC_Group_51_RoHS_L_7.pdf, Composition="Thick Film", Failure Rate=-, Features="Moisture Resistant", Height - Seated (Max)="0.022\" (0.55mm)", Packaging="Cut Tape (CT)", Part Status=Active, Pricing 1="1=0.15, 10=0.022, 100=0.009, 1000=0.00403, 2500=0.0035 (AUD)", RoHS="RoHS Compliant", Size / Dimension="0.063\" L x 0.031\" W (1.60mm x 0.80mm)", Stock 1=319012, Supplier 1=Digi-Key
R3 R4 R5 R6 R9 R10 R11 R12 R16 R17 R19 R21 R29 R31: library part R100k_0603, "100k Resistor 0603", Manufacturer=Yageo, Manufacturer Part Number=RC0402FR-07100KL, Operating Temperature="-55°C ~ 155°C", Package / Case="0402 (1005 Metric)", Power (Watts)="0.063W, 1/16W", Resistance (Ohms)=100k, Supplier Device Package=0402, Supplier Part Number 1=311-100KLRCT-ND, Temperature Coefficient=±100ppm/°C, Tolerance=±1%, Category=Resistors, ComponentLink1Description=http://www.yageo.com/documents/recent/PYu-RC_Group_51_RoHS_L_7.pdf, ComponentLink1URL=http://www.yageo.com/documents/recent/PYu-RC_Group_51_RoHS_L_7.pdf, Composition="Thick Film", Failure Rate=-, Features="Moisture Resistant", Height - Seated (Max)="0.016\" (0.40mm)", Packaging="Cut Tape (CT)", Part Status=Active, Pricing 1="1=0.15, 10=0.019, 100=0.008, 1000=0.00358, 2500=0.00311, 5000=0.00257 (AUD)", RoHS="RoHS Compliant", Size / Dimension="0.039\" L x 0.020\" W (1.00mm x 0.50mm)", Stock 1=7264033, Supplier 1=Digi-Key
R13 R14 R15 R18 R20 R22 R23 R27 R28 R30 R32: library part R1k_0603, "1k Resistor 0603", Manufacturer=Yageo, Manufacturer Part Number=RC0603FR-071KL, Operating Temperature="-55°C ~ 155°C", Package / Case="0603 (1608 Metric)", Power (Watts)="0.1W, 1/10W", Resistance (Ohms)=1k, Supplier Device Package=0603, Supplier Part Number 1=311-1.00KHRCT-ND, Temperature Coefficient=±100ppm/°C, Tolerance=±1%, Category=Resistors, ComponentLink1Description=http://www.yageo.com/documents/recent/PYu-RC_Group_51_RoHS_L_7.pdf, ComponentLink1URL=http://www.yageo.com/documents/recent/PYu-RC_Group_51_RoHS_L_7.pdf, Composition="Thick Film", Failure Rate=-, Features="Moisture Resistant", Height - Seated (Max)="0.022\" (0.55mm)", Packaging="Cut Tape (CT)", Part Status=Active, Pricing 1="1=0.15, 10=0.022, 100=0.009, 1000=0.00403, 2500=0.0035 (AUD)", RoHS="RoHS Compliant", Size / Dimension="0.063\" L x 0.031\" W (1.60mm x 0.80mm)", Stock 1=11536947, Supplier 1=Digi-Key
R24 R25 R26 R33 R34: library part R220_0603, "220 Resistor 0603", Manufacturer="TE Connectivity Passive Product", Operating Temperature="-55°C ~ 155°C", Package / Case="0603 (1608 Metric)", Power (Watts)="0.1W, 1/10W", Resistance (Ohms)=220, Supplier Device Package=0603, Supplier Part Number 1=A130087TR-ND, Temperature Coefficient=±100ppm/°C, Tolerance=±1%, Category=Resistors, ComponentLink1Description=https://www.digikey.com.au/product-detail/en/te-connectivity-passive-product/CRGCQ0603J220R/A130087CT-ND/8577919, ComponentLink1URL=https://www.digikey.com.au/product-detail/en/te-connectivity-passive-product/CRGCQ0603J220R/A130087CT-ND/8577919, Composition="Thick Film", Failure Rate=-, Features="Moisture Resistant", Height - Seated (Max)="0.022\" (0.55mm)", Packaging="Cut Tape (CT)", Part Status=Active, RoHS="RoHS Compliant", Size / Dimension="0.063\" L x 0.031\" W (1.60mm x 0.80mm)", Supplier 1=Digi-Key
R35 R38 R44: library part R10k_0603, "10k Resistor 0603", Manufacturer="Panasonic Electronic Components", Manufacturer Part Number=ERJ-3EKF1002V, Operating Temperature="-55°C ~ 155°C", Package / Case="0603 (1608 Metric)", Power (Watts)="0.1W, 1/10W", Resistance (Ohms)=10k, Supplier Device Package=0603, Supplier Part Number 1=P10.0KHCT-ND, Temperature Coefficient=±100ppm/°C, Tolerance=±1%, Category=Resistors, ComponentLink1Description=http://industrial.panasonic.com/www-cgi/jvcr13pz.cgi?E+PZ+3+AOA0002+ERJ3EKF1002V+7+WW, ComponentLink1URL=http://industrial.panasonic.com/www-cgi/jvcr13pz.cgi?E+PZ+3+AOA0002+ERJ3EKF1002V+7+WW, Composition="Thick Film", Features="Automotive AEC-Q200", Height="0.022\" (0.55mm)", LatestRevisionDate=17-Jul-2002, LatestRevisionNote="Re-released for DXP Platform.", Number of Terminations=2, PackageDescription="Axial Device, Thru-Hole; 2 Leads; 0.3 in Pin Spacing", PackageReference=AXIAL-0.3, Packaging="Cut Tape (CT)", Pricing 1="1=0.15, 50=0.0166, 100=0.0122, 250=0.00936, 500=0.00748, 1000=0.00552 (AUD)", Published=8-Jun-2000, Publisher="Altium Limited", RoHS="RoHS Compliant", Size / Dimension="0.063\" L x 0.031\" W (1.60mm x 0.80mm)", Stock 1=10895920, Supplier 1=Digi-Key
R36: library part R15k_0603, "15k Resistor 0603", Manufacturer=Yageo, Manufacturer Part Number=RC0603FR-0715KL, Operating Temperature="-55°C ~ 155°C", Package / Case="0603 (1608 Metric)", Power (Watts)="0.1W, 1/10W", Supplier Device Package=0603, Supplier Part Number 1=311-15.0KHRCT-ND, Temperature Coefficient=±100ppm/°C, Tolerance=±1%, Category=Resistors, ComponentLink1Description=http://www.yageo.com/documents/recent/PYu-RC_Group_51_RoHS_L_7.pdf, ComponentLink1URL=http://www.yageo.com/documents/recent/PYu-RC_Group_51_RoHS_L_7.pdf, Composition="Thick Film", Failure Rate=-, Features="Moisture Resistant", Height - Seated (Max)="0.022\" (0.55mm)", Packaging="Cut Tape (CT)", Part Status=Active, Pricing 1="1=0.14, 10=0.021, 100=0.0084, 1000=0.00376, 2500=0.00326 (AUD)", RoHS="RoHS Compliant", Size / Dimension="0.063\" L x 0.032\" W (1.60mm x 0.80mm)", Stock 1=2420880, Supplier 1=Digi-Key
R37 R41: library part R120_0603, "120 Resistor 0603", Manufacturer=Yageo, Manufacturer Part Number=RC0603FR-07120RL, Operating Temperature="-55°C ~ 155°C", Package / Case="0603 (1608 Metric)", Power (Watts)="0.1W, 1/10W", Resistance (Ohms)=120, Supplier Device Package=0603, Supplier Part Number 1=311-120HRCT-ND, Temperature Coefficient=±100ppm/°C, Tolerance=±1%, Category=Resistors, ComponentLink1Description=http://www.yageo.com/documents/recent/PYu-RC_Group_51_RoHS_L_7.pdf, ComponentLink1URL=http://www.yageo.com/documents/recent/PYu-RC_Group_51_RoHS_L_7.pdf, Composition="Thick Film", Failure Rate=-, Features="Moisture Resistant", Height - Seated (Max)="0.022\" (0.55mm)", Packaging="Cut Tape (CT)", Part Status=Active, Pricing 1="1=0.15, 10=0.022, 100=0.009, 1000=0.00403, 2500=0.0035 (AUD)", RoHS="RoHS Compliant", Size / Dimension="0.063\" L x 0.031\" W (1.60mm x 0.80mm)", Stock 1=2195111, Supplier 1=Digi-Key
R39 R40 R45 R46: library part R100_0603, "100 Resistor 0603", Manufacturer="Panasonic Electronic Components", Manufacturer Part Number=ERJ-3EKF1000V, Operating Temperature="-55°C ~ 155°C", Package / Case="0603 (1608 Metric)", Power (Watts)="0.1W, 1/10W", Resistance (Ohms)=100, Supplier Device Package=0603, Supplier Part Number 1=P100HCT-ND, Temperature Coefficient=±100ppm/°C, Tolerance=±1%, Category=Resistors, ComponentLink1Description=https://industrial.panasonic.com/cdbs/www-data/pdf/RDA0000/AOA0000C283.pdf, ComponentLink1URL=https://industrial.panasonic.com/cdbs/www-data/pdf/RDA0000/AOA0000C283.pdf, Composition="Thick Film", Failure Rate=-, Features="Automotive AEC-Q200", Height - Seated (Max)="0.022\" (0.55mm)", Packaging="Cut Tape (CT)", Part Status=Active, Pricing 1="1=0.14, 10=0.026, 25=0.0184, 50=0.0142, 100=0.0105, 250=0.00796, 500=0.00638, 1000=0.0047 (AUD)", RoHS="RoHS Compliant", Size / Dimension="0.063\" L x 0.031\" W (1.60mm x 0.80mm)", Stock 1=1638281, Supplier 1=Digi-Key
R42: library part R4.7k_0603, "4.7k Resistor 0603", Manufacturer=Yageo, Manufacturer Part Number=RC0603FR-074K7L, Operating Temperature="-55°C ~ 155°C", Package / Case="0603 (1608 Metric)", Power (Watts)="0.1W, 1/10W", Resistance (Ohms)=4.7k, Supplier Device Package=0603, Supplier Part Number 1=311-4.70KHRCT-ND, Temperature Coefficient=±100ppm/°C, Tolerance=±1%, Category=Resistors, ComponentLink1Description=http://www.yageo.com/documents/recent/PYu-RC_Group_51_RoHS_L_7.pdf, ComponentLink1URL=http://www.yageo.com/documents/recent/PYu-RC_Group_51_RoHS_L_7.pdf, Composition="Thick Film", Failure Rate=-, Features="Moisture Resistant", Height - Seated (Max)="0.022\" (0.55mm)", Packaging="Cut Tape (CT)", Part Status=Active, Pricing 1="1=0.15, 10=0.022, 100=0.009, 1000=0.00403, 2500=0.0035 (AUD)", RoHS="RoHS Compliant", Size / Dimension="0.063\" L x 0.031\" W (1.60mm x 0.80mm)", Stock 1=5834802, Supplier 1=Digi-Key
R43: library part R2.61k_0603, "2.61k Resistor 0603", Manufacturer=Yageo, Manufacturer Part Number=RC0603FR-072K61L, Operating Temperature="-55°C ~ 155°C", Package / Case="0603 (1608 Metric)", Power (Watts)="0.1W, 1/10W", Resistance (Ohms)=2.61k, Supplier Device Package=0603, Supplier Part Number 1=311-2.61KHRCT-ND, Temperature Coefficient=±100ppm/°C, Tolerance=±1%, Category=Resistors, ComponentLink1Description=http://www.yageo.com/documents/recent/PYu-RC_Group_51_RoHS_L_7.pdf, ComponentLink1URL=http://www.yageo.com/documents/recent/PYu-RC_Group_51_RoHS_L_7.pdf, Composition="Thick Film", Failure Rate=-, Features="Moisture Resistant", Height - Seated (Max)="0.022\" (0.55mm)", Packaging="Cut Tape (CT)", Part Status=Active, Pricing 1="1=0.15, 10=0.022, 100=0.009, 1000=0.00403, 2500=0.0035 (AUD)", RoHS="RoHS Compliant", Size / Dimension="0.063\" L x 0.031\" W (1.60mm x 0.80mm)", Stock 1=104258, Supplier 1=Digi-Key
"TEENSY 3.6": Current Rating=2A, Insulation Color=Black, Manufacturer=3M, Manufacturer Part Number=929974-01-36-RK, Material Flammability Rating="UL94 V-0", Operating Temperature="-40°C ~ 105°C", Supplier Part Number 1=929974E-01-36-ND, Voltage Rating=1500V, Applications=-, Category="Connectors, Interconnects", ComponentLink1Description=http://multimedia.3m.com/mws/media/22500O/3mtm-boardmount-skt-100-100x-100strt-sldr-tails-ts0815.pdf?&fn=ts0815.pdf, ComponentLink1URL=http://multimedia.3m.com/mws/media/22500O/3mtm-boardmount-skt-100-100x-100strt-sldr-tails-ts0815.pdf?&fn=ts0815.pdf, Connector Type=Receptacle, Contact Finish - Mating=Tin, Contact Finish - Post=Tin, Contact Finish Thickness - Mating="100µin (2.54µm)", Contact Finish Thickness - Post="100µin (2.54µm)", Contact Length - Post="0.125\" (3.18mm)", Contact Material="Copper Alloy", Contact Shape=Square, Contact Type=Forked, Fastening Type=Push-Pull, Features=-, Ingress Protection=-, Insulation Height="0.325\" (8.25mm)", Insulation Material="Polycyclohexylenedimethylene Terephthalate (PCT), Glass Filled", Mated Stacking Heights=-, Mounting Type="Through Hole", Number of Positions=36, Number of Positions Loaded=All, Number of Rows=1, Packaging=Bulk, Part Status=Active, Pitch - Mating="0.100\" (2.54mm)", Pricing 1="1=3.64, 10=3.302, 100=2.8305, 500=2.35872, 1000=2.02176, 5000=1.79263 (AUD)", RoHS="RoHS Compliant", Row Spacing - Mating=-, Stock 1=7206, Style="Board to Board", Supplier 1=Digi-Key, Termination=Solder
U1: Case/Package=TSSOP, Input Bias Current=10pA, Input Offset Voltage (Vos)=6mV, Manufacturer="Texas Instruments", Max Operating Temperature=85°C, Max Supply Voltage=5.5V, Min Operating Temperature=-40°C, Min Supply Voltage=2.7V, Nominal Supply Current=1mA, Package Quantity=250, Power Supply Rejection Ratio (PSRR)=90.46dB, Supplier Part Number 1=OPA4342EADKR-ND, Voltage Gain=124dB, Bandwidth=1MHz, Common Mode Rejection Ratio=76dB, ComponentLink1Description=https://datasheet.ciiva.com/26226/sbos106a-26226441.pdf, ComponentLink1URL=https://datasheet.ciiva.com/26226/sbos106a-26226441.pdf, ComponentLink2Description=https://datasheet.ciiva.com/1798/opa4342-1798587.pdf, ComponentLink2URL=https://datasheet.ciiva.com/1798/opa4342-1798587.pdf, ComponentLink3Description=https://datasheet.ciiva.com/7684/53610-7684523.pdf, ComponentLink3URL=https://datasheet.ciiva.com/7684/53610-7684523.pdf, ComponentLink4Description=https://datasheet.ciiva.com/14458/sbos106a-14458539.pdf, ComponentLink4URL=https://datasheet.ciiva.com/14458/sbos106a-14458539.pdf, ComponentLink5Description=https://datasheet.ciiva.com/1798/opa4342-1798588.pdf, ComponentLink5URL=https://datasheet.ciiva.com/1798/opa4342-1798588.pdf, ComponentLink6Description=https://datasheet.ciiva.com/2974/sbos106a-2974060.pdf, ComponentLink6URL=https://datasheet.ciiva.com/2974/sbos106a-2974060.pdf, ComponentLink7Description=https://datasheet.ciiva.com/1798/opa4342-1798589.pdf, ComponentLink7URL=https://datasheet.ciiva.com/1798/opa4342-1798589.pdf, ComponentLink8Description=https://datasheet.ciiva.com/48711/001072822-da-01-en-ic-opamp-gp-r-opa4342ea-250-tssop-14-tid-48711451.pdf, ComponentLink8URL=https://datasheet.ciiva.com/48711/001072822-da-01-en-ic-opamp-gp-r-opa4342ea-250-tssop-14-tid-48711451.pdf, Gain Bandwidth Product=1MHz, Lead Free="Lead Free", Manufacturer Part Number=OPA4342EA/250, Max I/O Voltage=6mV, Nominal Gain Bandwidth Product=1MHz, Number of Amplifiers=4, Number of Channels=4, Number of Circuits=4, Number of Elements=4, Number of Pins=14, Packaging="Tape and Reel", Pricing 1="1=2.83, 10=2.544, 100=2.0447 (USD)", Radiation Hardening=No, REACH SVHC="No SVHC", Slew Rate=1V/µs, Stock 1=233, Supplier 1=Digi-Key, Unity Gain Bandwidth Product=1MHz
U2 U4: Manufacturer="Texas Instruments", Manufacturer Part Number=SN65HVD230DR, Operating Temperature="-40°C ~ 85°C", Package / Case="8-SOIC (0.154\", 3.90mm Width)", Supplier Device Package=8-SOIC, Supplier Part Number 1=296-11654-1-ND, Voltage - Supply="3 V ~ 3.6 V", Category="Integrated Circuits (ICs)", ComponentLink1Description=http://www.ti.com/lit/ds/symlink/sn65hvd230.pdf, ComponentLink1URL=http://www.ti.com/lit/ds/symlink/sn65hvd230.pdf, Data Rate=1Mbps, Duplex=Half, Mounting Type="Surface Mount", Number of Drivers/Receivers=1/1, Packaging="Cut Tape (CT)", Part Status=Active, Pricing 1="1=3.01, 10=2.698, 100=2.1685, 500=1.78162, 1000=1.4762 (AUD)", Protocol=CAN, RoHS="RoHS Compliant", Stock 1=41612, Supplier 1=Digi-Key, Type=Transceiver
U3: Current Rating="3.9A per Contact", Insulation Color=Black, Manufacturer="Samtec Inc.", Manufacturer Part Number=MMS-110-01-L-SV, Material Flammability Rating=-, Operating Temperature="-55°C ~ 125°C", Supplier Part Number 1=SAM1230-10-ND, Applications=-, Category="Connectors, Interconnects", ComponentLink1Description=http://suddendocs.samtec.com/prints/mms01mkt.pdf, ComponentLink1URL=http://suddendocs.samtec.com/prints/mms01mkt.pdf, Connector Type=Receptacle, Contact Finish - Mating=Gold, Contact Finish - Post=Tin, Contact Finish Thickness - Mating="10µin (0.25µm)", Contact Finish Thickness - Post=-, Contact Length - Post="0.115\" (2.92mm)", Contact Material="Phosphor Bronze", Contact Shape=Square, Contact Type="Female Socket", Fastening Type=Push-Pull, Features=-, Ingress Protection=-, Insulation Height="0.175\" (4.45mm)", Insulation Material="Liquid Crystal Polymer (LCP)", Mated Stacking Heights=-, Mounting Type="Through Hole", Number of Positions=10, Number of Positions Loaded=All, Number of Rows=1, Packaging=Tube, Part Status=Active, Pitch - Mating="0.079\" (2.00mm)", Pricing 1="1=6.2, 10=5.369, 100=4.5428, 500=3.61358, 1000=2.94247, 5000=2.68436, 10000=2.58112 (AUD)", RoHS="RoHS Compliant", Row Spacing - Mating=-, Stock 1=605, Style="Board to Board or Cable", Supplier 1=Digi-Key, Termination=Solder, Voltage Rating=-
U5: Current - Limit (Min)=1A, Manufacturer="ON Semiconductor", Manufacturer Part Number=NCP1117ST50T3G, Operating Temperature="0°C ~ 125°C", Package / Case="TO-261-4, TO-261AA", Supplier Device Package=SOT-223, Supplier Part Number 1=NCP1117ST50T3GOSCT-ND, Voltage - Dropout (Typical)="1.07V @ 800mA", Voltage - Input="Up to 20V", Voltage - Output=5V, Category="Integrated Circuits (ICs)", ComponentLink1Description=http://www.onsemi.com/pub_link/Collateral/NCP1117-D.PDF, ComponentLink1URL=http://www.onsemi.com/pub_link/Collateral/NCP1117-D.PDF, Current - Output=1A, Mounting Type="Surface Mount", Packaging="Cut Tape (CT)", Part Status=Active, Pricing 1="1=0.7, 10=0.604, 100=0.4508, 500=0.35418, 1000=0.27368 (AUD)", Regulator Topology="Positive Fixed", RoHS="RoHS Compliant", Stock 1=36810, Supplier 1=Digi-Key

## Via types
v1: diameter 0.7, hole 0.4, Top Layer to Bottom Layer, 103 vias
v2: diameter 0.6, hole 0.3, Top Layer to Bottom Layer, 16 vias
v3: diameter 0.5, hole 0.3, Top Layer to Bottom Layer, 3 vias

## Nets (pads, with @x,y where several pads share a name; then routed paths per layer and width w, separated by ;. In a path a pad name is that pad's centre, name@x,y a point inside that pad or via, vN(x,y) a via of type N, cw(c..) or ccw(c..) an arc to the next point about the centre after c; other vN are vias at no path point)
+3.3V: "TEENSY 3.6.3.3V" C7.2 C10.1 C11.2 R17.2 R19.2 R21.2 R29.2 R31.2 U1.4 U2.3 U3.1 U4.3 | length 133.5
  Top Layer w0.3: 261.825,180.125 v1(261.825,184.65)
  Top Layer w0.4: U2.3 231.535,230.815 232.85,229.5 C11.2 238.65,229.5 239.725,228.425 245.33,228.425 251.67,222.085 253.935,222.085 255.175,223.325 260.775,223.325 U3.1 ; 241.51,181.445 243.18,181.445 244.6,180.025 v1(250.575,180.025) ; v1@252.795,180.125 261.825,180.125 266.875,180.125 268.025,181.275 269.975,181.275 273.75,177.5 v1(273.75,173.05) ; 256.75,211.925 259.275,209.4 C10.1 ; v1@275.525,173 U1.4
  Top Layer w0.6: R21.2 226.675,188.4 ; R17.2 225.228,197.2 226.6,195.828 226.6,195.728 226.625,195.703 226.625,192.95 R19.2 ; R31.2 226.675,179.8 226.675,181.45 ; R29.2 226.65,183.6 226.675,183.625 ; 226.675,193 226.675,188.4 ; v3(236.35,181.45) 226.675,181.45 ; v1@238.55,181.445 241.51,181.445 ; C7.2@263.975,184.025 264.09,183.91 U4.3 ; 226.675,181.45 226.675,183.625 ; 226.675,183.625 226.675,188.4
  Bottom Layer w0.4: v1@250.55,180.1 v1(252.925,180.1) ; v1(261.825,184.65) v1(264,184.65) ; v1@273.875,173.025 v1(275.6,173.025)
  Bottom Layer w0.6: v3(236.35,181.45) v1(238.375,181.45)
+5V: "TEENSY 3.6.VIN" C6.1 D8.1 P1.14 P1.22 P1.23 R16.1 R43.1 | length 106.2
  Top Layer w0.4: v1(236.6,192.65) 237.05,193.1 v1(237.05,197.85) ; v1@243.075,198.05 244.375,199.35 v1(248.75,199.35)
  Top Layer w0.6: D8.1 231.325,194.425 231.325,192.675 ; R43.1 231.325,192.675 ; v1@233.25,192.675 231.325,192.675 ; v1(236.6,192.65) 237.325,191.925 237.325,180.025 240.985,176.365 241.41,176.365 ; 241.51,176.365 241.41,176.365 ; R16.1 v1@251.825,199.3 ; v1(266.7,159.025) 253.225,159.025 250.225,162.025 250.225,167.55 241.41,176.365 ; C6.1@273.95,165.075 273.95,165.025 270.382,161.457 P1.14 P1.23 P1.22
  Bottom Layer w0.4: v1@237,197.889 v1@243.1,197.889 ; v1@248.725,199.325 248.75,199.325 v1(251.85,199.35)
  Bottom Layer w0.6: v1(233.3,192.675) v1@236.65,192.675 ; v1(266.7,159.025) 268.498,159.025 P1.14 P1.14@270.35,160.909 ; P1.23@270.35,154.559 P1.23
  other v1: 243.05,197.9
+16V: C12.2 C14.1 D4.1 F1.1 P1.2 R42.1 U5.3 | length 46.8
  Top Layer w0.6: P1.2 227.962,154.637 230.925,157.6 235.2,157.6 240.675,163.075 240.675,170.85 239.6,171.925 D4.1@237.525,171.925 ; R42.1 230.85,173.175 F1.1 236.825,171.875 D4.1 D4.1@237.525,171.925 ; U5.3 234.7,178.425 C12.2 C14.1 234.775,174.65 236.5,174.65 237.525,173.625 D4.1@237.525,171.925
ADC_1: "TEENSY 3.6.23" R3.2 U1.1 U1.2 | length 48.3
  Top Layer w0.4: 241.51,183.985 244.565,183.985 v1@250.855,190.275 ; v1(252.95,190.275) 262.725,190.275 273.65,179.35 R3.2 ; U1.2 U1.1 R3.2@277.625,179.3
  Bottom Layer w0.4: v1(250.712,190.284) 252.859,190.284 v1@252.875,190.3
ADC_1_IN: P1.20 R1.1 | length 13.1
  Top Layer w0.6: R1.1 277.175,160 282.616,154.559 P1.20
ADC_2: "TEENSY 3.6.20" R4.2 U1.13 U1.14 | length 62.5
  Top Layer w0.4: 241.51,191.605 242.605,191.605 v1@246.6,195.6 ; v1(246.55,198) 249.2,198 251.325,200.125 252.25,200.125 254.4,197.975 259.425,197.975 260.254,197.146 269.054,197.146 282.429,183.771 282.429,180.546 R4.2 ; U1.13@283.425,174.379 U1.14 R4.2@283.425,179.525
  Bottom Layer w0.4: v1(246.55,195.625) v1@246.55,197.925
ADC_2_IN: P1.18 R2.1 | length 5.3
  Top Layer w0.6: R2.1 284.15,164.25 287.142,161.258 P1.18
ADC_3: "TEENSY 3.6.22" R9.2 U1.6 U1.7 | length 57.7
  Top Layer w0.4: 241.51,186.525 244.505,186.525 v1@250.855,192.875 ; v1(252.962,192.959) 252.981,192.941 267.434,192.941 278.6,181.775 278.6,180.35 R9.2 ; U1.6@277.625,171.621 U1.7 279.45,171.05 R9.2@279.45,179.35
  Bottom Layer w0.4: v1(250.712,192.959) 252.691,192.959 v1@252.7,192.95
ADC_3_IN: P1.17 R7.1 | length 6.3
  Top Layer w0.6: R7.1 278.475,164.875 282.441,160.909 P1.17
ADC_4: "TEENSY 3.6.21" R10.2 U1.8 U1.9 | length 61.8
  Top Layer w0.4: 241.51,189.065 247.695,195.25 v1(247.725,195.25) v1@247.9,195.25 ; v1(252.962,195.185) 253.127,195.349 268.524,195.349 280.475,183.398 280.475,180.525 R10.2 ; R10.2@281.6,179.35 281.6,171.05 U1.8 U1.9@283.425,171.6
  Bottom Layer w0.4: v1(247.725,195.25) 247.8,195.175 247.81,195.185 v1(252.962,195.185)
ADC_4_IN: P1.19 R8.1 | length 12.2
  Top Layer w0.6: R8.1 282.8,163.95 285.075,161.675 285.075,156.626 P1.19
AGND: "TEENSY 3.6.AGND" C1.2 C2.2 C3.2 C4.2 C6.2 P1.15 P1.16 P1.21 R3.1 R4.1 R5.2 R6.2 R9.1 R10.1 R11.2 R12.2 U1.11 | length 48.1
  Top Layer w0.4: U1.11 v1@285.35,173
  Top Layer w0.6: 241.51,178.905 v1@250.515,169.9 ; v1(253.3,169.825) v1@262.075,169.825 ; v1(267.325,170.625) v3(272.95,170.625) ; P1.15 P1.15@274.572,161.128 ; R5.2 277.25,166.35 C1.2@277.25,167.675 ; C1.2 C1.2@277.25,167.675 ; v1(277.25,168.9) C1.2@277.25,167.675 ; R11.2@278.55,166.3 R11.2 278.475,167.65 C3.2 278.5,167.675 C1.2@277.25,167.675 ; v1(282.775,168.875) 282.8,168.875 C4.2 ; R12.2 282.8,166.3 C4.2 ; R6.2 284.1,166.325 C2.2 C4.2
  Bottom Layer w0.6: v1(250.575,169.85) v1@253.3,169.85 ; v1(262.2,169.8) 262.975,170.575 267.2,170.575 v1@267.25,170.625 ; v1@277.25,168.875 v1(277.25,168.9)
  other v1: 274,167.025 285.275,173 277.65,181.225 279.525,181.225 281.6,181.35 283.55,181.375
CAN_RXD_0: "TEENSY 3.6.4" U4.4 | length 12.4
  Top Layer w0.6: 256.75,189.065 261.06,189.065 262.82,187.305 U4.4
CAN_RXD_1: "TEENSY 3.6.34" U2.4 | length 11.2
  Top Layer w0.6: v1@235.775,232.245 241.51,232.245
  Bottom Layer w0.6: v1@230.25,232.225 v1(235.75,232.225)
  other v1: 230.275,232.15
CAN_TXD_0: "TEENSY 3.6.3" U4.1 | length 13.9
  Top Layer w0.6: 256.75,186.525 256.75,186.375 v1(261.825,186.375) ; v1(263.725,186.35) 265.325,186.35 266.63,185.045 U4.1
  Bottom Layer w0.6: v1@261.85,186.375 261.875,186.35 v1(263.725,186.35)
CAN_TXD_1: "TEENSY 3.6.33" U2.1 | length 9.8
  Top Layer w0.6: U2.1 234.075,233.11 235.75,234.785 241.51,234.785
CANH_0: D7.2 P1.24 R37.1 R39.1 U4.7 | length 24.7
  Top Layer w0.6: R39.1@265.36,171.965 U4.7 ; R39.1 265.5,171.675 R37.1 265.95,170.375 266.55,169.775 266.55,167.15 D7.2 265.5,165.15 268.225,162.425 268.225,156.592 P1.24
CANH_1: D9.2 P1.10 R41.1 R45.1 U2.7 | length 82.5